# Altium PCB omnibotdebug.PcbDoc
Units mil, origin at the board's own origin, x right, y up, seen from the top; angles counter-clockwise.
Board outline 640 x 455 mil, 2 copper layers (Top Layer, Bottom Layer); 5 components, 6 nets, 34 pads, 8 vias.
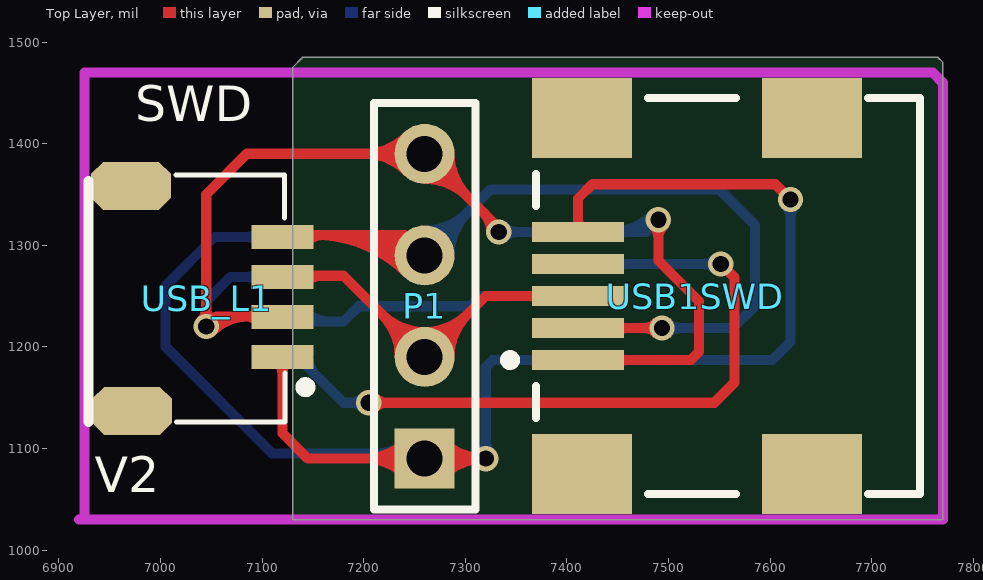
[diagram p0: Top Layer view]
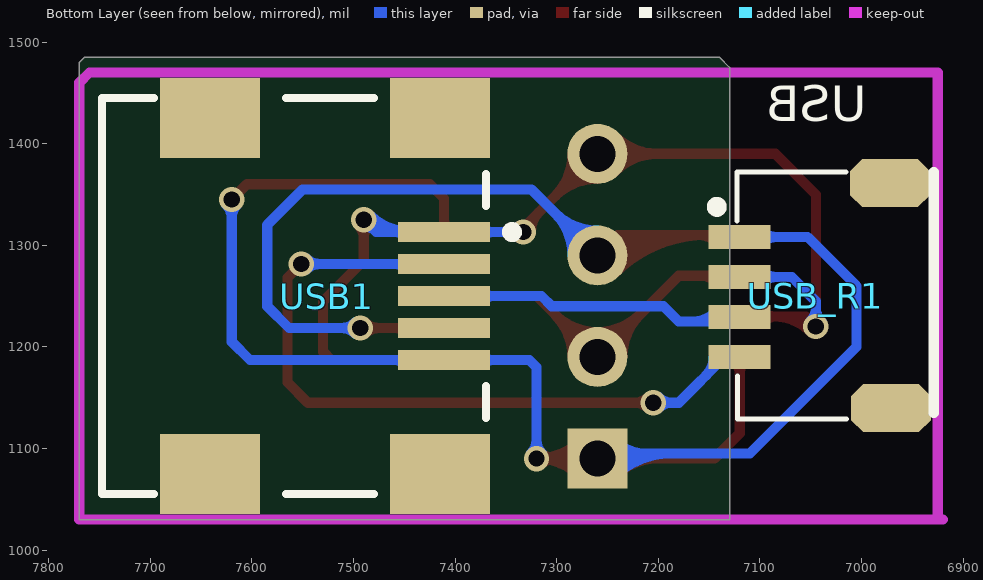
[diagram p1: Bottom Layer view, seen from below]

## Layer stack, top to bottom
Top Layer: signal copper 1.4
Dielectric: dielectric 12.6, FR-4, Dk 4.8
Bottom Layer: signal copper 1.4

## Board outline
7130,1030 7770,1030 7770,1480 7765,1485 7140,1485 7130,1475

## Design rules (kind name [scope] priority, off if disabled: settings)
Clearance [All] p1: gap=10
PolygonConnect [All] p1: connectstyle=Relief reliefconductorwidth=10 reliefentries=4 polygonreliefangle="90 Angle"
RoutingVias [All] p1: holewidth=28 width=50 viastyle="Through Hole" minholewidth=16 minwidth=25 maxholewidth=28 maxwidth=50
SilkscreenOverComponentPads [All] p1: minsilkscreentomaskgap=10
SolderMaskExpansion [All] p1: expansion=4
Width [All] p1: maxlimit=10 minlimit=10 preferedwidth=10
27 further rules are at their usual default settings.

## Components (designator, comment, footprint, x,y, rotation, side; value= is the part's Value field where it differs from the comment)
P1 "Header 4" HDR1X4 7260,1090 r90 top
USB1 "USB-B(Mini)" USB/SM0.8-6H5_M 7720,1250 r0 bottom
USB1SWD "USB-B(Mini)" USB/SM0.8-6H5_M 7720,1250 r0 top
USB_L1 "Header 4" SH1.0-4P 7120,1190 r90 top
USB_R1 "Header 4" SH1.0-4P 7120,1308.11 r270 bottom

## Footprints (in the part's own frame and the unit in brackets; to place one, negate y for a bottom-side part, rotate by r counter-clockwise, add the part's x,y. Pads: shape width x height; smd on the part's side, far side on the other; paste and mask are expansions set on the pad)
HDR1X4 [mm] "Connector; Header; 4 Position"
  rect 1.5x1.5 hole 0.9: 1(0,0)
  round 1.5 hole 0.9: 2(2.54,0) 3(5.08,0) 4(7.62,0)
  silkscreen extent -1.27,-1.27 8.89,1.27
SH1.0-4P [mm]
  rect 0.6x1.55 smd: 1(0,0) 2(1,0) 3(2,0) 4(3,0)
  oct 1.2x2 smd: A(-1.346,3.759) B(4.279,3.785)
  silkscreen extent -1.63,-0.7 4.55,4.85
USB/SM0.8-6H5_M [mm]
  rect 2.3x0.5 smd: 1(-7.85,-1.6) 2(-7.85,-0.8) 3(-7.85,0) 4(-7.85,0.8) 5(-7.85,1.6)
  rect 2.5x2 smd: 6(-7.75,4.45) 7(-1.996,4.45) 8(-7.75,-4.45) 9(-1.996,-4.45)
  silkscreen extent -9.67,-4.95 0.7,4.95

## Part data
P1 USB_L1 USB_R1: "Header, 4-Pin"
USB1 USB1SWD: library part USB5

## Via types
v1: diameter 25, hole 16, Top Layer to Bottom Layer, 8 vias

## Nets (pads, with @x,y where several pads share a name; then routed paths per layer and width w, separated by ;. In a path a pad name is that pad's centre, name@x,y a point inside that pad or via, vN(x,y) a via of type N, cw(c..) or ccw(c..) an arc to the next point about the centre after c; other vN are vias at no path point)
5V: P1.4 USB1.1 USB1SWD.1 USB_L1.2 USB_R1.2 | length 1774.3
  Top Layer w10: v1@7039.7,1225.3 ccw(c7026.89,1238.11) 7045,1238.11 ccw(c7063.11,1238.11) v1@7050.3,1225.3 ; v1@7043.23,1221.77 cw(c7063.11,1201.89) 7063.11,1230 ; v1@7050.3,1214.7 cw(c7087.25,1177.75) 7087.25,1230 ; 7083.34,1230 cw(c7083.34,1211.41) USB_L1.2@7096.48,1224.55 ; 7086.38,1230 ccw(c7086.38,1244.29) USB_L1.2@7096.48,1234.19 ; USB_L1.2@7130,1230 7055,1230 v1(7045,1220) 7045,1350 7085,1390 P1.4 7332.99,1317.01 v1(7332.99,1312.99) ; P1.4@7242.66,1372.66 ccw(c7200.79,1330.79) 7200.79,1390 ccw(c7200.79,1449.21) P1.4@7242.66,1407.34 ; P1.4@7249.73,1379.73 ccw(c7224.93,1354.93) 7224.93,1390 ccw(c7224.93,1425.07) P1.4@7249.73,1400.27 ; P1.4@7260,1365.47 cw(c7260,1306.26) 7301.87,1348.13 cw(c7343.74,1390) P1.4@7284.53,1390 ; P1.4@7260,1375.47 cw(c7260,1340.4) 7284.8,1365.2 cw(c7309.6,1390) P1.4@7274.53,1390 ; 7317.35,1332.65 cw(c7297.69,1312.99) v1@7325.49,1312.99 ; USB1SWD.1 7522.01,1187.01 7530,1195 7530,1245 7490,1285 v1(7490,1325) ; USB1SWD.1@7449.8,1183.58 cw(c7458.07,1175.32) 7458.07,1187.01 cw(c7458.07,1198.7) USB1SWD.1@7449.8,1190.43 ; v1@7484.7,1319.7 cw(c7471.89,1306.89) 7490,1306.89 cw(c7508.11,1306.89) v1@7495.3,1319.7
  Bottom Layer w10: v1@7039.7,1225.3 ccw(c7026.89,1238.11) 7045,1238.11 ccw(c7063.11,1238.11) v1@7050.3,1225.3 ; v1(7045,1220) 7045,1245 7068.74,1268.74 USB_R1.2 ; USB_R1.2@7096.48,1263.92 ccw(c7084.86,1252.3) 7084.86,1268.74 ccw(c7084.86,1285.18) USB_R1.2@7096.48,1273.56 ; v1(7332.99,1312.99) USB1.1 7477.99,1312.99 v1(7490,1325) ; v1@7338.3,1307.69 cw(c7351.1,1294.89) 7351.1,1312.99 cw(c7351.1,1331.1) v1@7338.3,1318.3 ; USB1.1@7372.09,1309.57 ccw(c7363.82,1301.3) 7363.82,1312.99 ccw(c7363.82,1324.68) USB1.1@7372.09,1316.42 ; USB1.1@7442.9,1312.99 ccw(c7442.9,1372.1) v1@7484.7,1330.3 ; USB1.1@7449.8,1309.57 cw(c7458.07,1301.3) 7458.07,1312.99 cw(c7458.07,1324.68) USB1.1@7449.8,1316.42 ; 7467.05,1312.99 ccw(c7467.05,1347.95) v1@7491.77,1323.23
DM: USB1.2 USB_R1.4 | length 843.2
  Top Layer w10: v1(7205,1145) 7545,1145 7565,1165 7565,1268 v1(7551.5,1281.5) ; v1@7210.3,1139.7 cw(c7223.11,1126.89) 7223.11,1145 cw(c7223.11,1163.11) v1@7210.3,1150.3
  Bottom Layer w10: USB_R1.4@7135,1190 7180,1145 v1(7205,1145) ; USB_R1.4@7145.51,1190 ccw(c7170.89,1190) 7152.94,1172.06 ; v1@7199.7,1139.7 ccw(c7186.89,1126.89) 7186.89,1145 ccw(c7186.89,1163.11) v1@7199.7,1150.3 ; USB1.2 v1(7551.5,1281.5) ; USB1.2@7449.8,1278.07 cw(c7458.07,1269.81) 7458.07,1281.5 cw(c7458.07,1293.19) USB1.2@7449.8,1284.92 ; v1@7546.19,1276.19 ccw(c7533.39,1263.39) 7533.39,1281.5 ccw(c7533.39,1299.6) v1@7546.19,1286.8
DP: USB1.3 USB_R1.3 | length 414.3
  Bottom Layer w10: USB_R1.3@7125,1225 7180,1225 7195,1240 7295,1240 ; USB_R1.3@7143.52,1234.19 ccw(c7165.69,1256.36) 7165.69,1225 ; 7220,1240 7295,1240 ; USB1.3@7372.09,1246.58 ccw(c7363.82,1238.31) 7363.82,1250 ccw(c7363.82,1261.69) USB1.3@7372.09,1253.43 ; USB1.3 7315,1250 7305,1240 7295,1240
GND: P1.1 USB1.5 USB1SWD.5 USB_L1.1 USB_R1.1 | length 2200.4
  Top Layer w10: USB_L1.1@7115.18,1185.18 cw(c7103.56,1173.56) 7120,1173.56 cw(c7136.44,1173.56) USB_L1.1@7124.82,1185.18 ; USB_L1.1@7120,1195 USB_L1.1 7120,1115 7145,1090 P1.1 v1(7320,1090) ; P1.1@7242.66,1072.66 ccw(c7200.79,1030.79) 7200.79,1090 ccw(c7200.79,1149.21) P1.1@7242.66,1107.34 ; P1.1@7249.73,1079.73 ccw(c7224.93,1054.93) 7224.93,1090 ccw(c7224.93,1125.07) P1.1@7249.73,1100.27 ; P1.1@7270.27,1079.73 cw(c7295.07,1054.93) 7295.07,1090 cw(c7295.07,1125.07) P1.1@7270.27,1100.27 ; P1.1@7277.34,1072.66 cw(c7319.21,1030.79) 7319.21,1090 cw(c7319.21,1149.21) P1.1@7277.34,1107.34 ; v1@7314.7,1084.7 ccw(c7301.89,1071.89) 7301.89,1090 ccw(c7301.89,1108.11) v1@7314.7,1095.3 ; USB1SWD.5@7407.52,1316.41 ccw(c7399.25,1324.68) 7410.94,1324.68 ccw(c7422.63,1324.68) USB1SWD.5@7414.37,1316.41 ; USB1SWD.5 7410.94,1345.94 7425,1360 7605,1360 v1(7620,1345)
  Bottom Layer w10: USB_R1.1@7096.48,1303.29 ccw(c7084.86,1291.67) 7084.86,1308.11 ccw(c7084.86,1324.55) USB_R1.1@7096.48,1312.93 ; USB_R1.1 7053.11,1308.11 7005,1260 7005,1200 7110,1095 P1.1@7260,1095 ; 7188.71,1095 cw(c7188.71,1018.71) P1.1@7242.66,1072.66 ; P1.1@7242.66,1107.34 cw(c7212.86,1137.14) 7212.86,1095 cw(c7212.86,1042.86) P1.1@7249.73,1079.73 ; v1@7314.7,1095.3 ccw(c7301.89,1108.11) 7320,1108.11 ccw(c7338.11,1108.11) v1@7325.3,1095.3 ; v1(7320,1090) 7320,1180 7327.01,1187.01 USB1.5 7602.01,1187.01 7620,1205 v1(7620,1345) ; USB1.5@7372.09,1183.59 ccw(c7363.82,1175.32) 7363.82,1187.01 ccw(c7363.82,1198.7) USB1.5@7372.09,1190.43 ; USB1.5@7449.8,1183.59 cw(c7458.07,1175.32) 7458.07,1187.01 cw(c7458.07,1198.7) USB1.5@7449.8,1190.43 ; v1@7614.7,1339.7 cw(c7601.89,1326.89) 7620,1326.89 cw(c7638.11,1326.89) v1@7625.3,1339.7
SCK: P1.2 USB1SWD.3 USB_L1.3 | length 699.3
  Top Layer w10: USB_L1.3@7110,1270 7180,1270 P1.2 7320,1250 USB1SWD.3 ; USB_L1.3@7143.52,1263.92 cw(c7158.19,1249.26) 7158.19,1270 ; USB_L1.3@7143.52,1273.56 ccw(c7152.1,1282.14) 7152.1,1270 ; P1.2@7235.47,1190 ccw(c7176.26,1190) 7218.13,1231.87 ccw(c7260,1273.74) 7260,1214.53 ccw(c7260,1273.74) 7301.87,1231.87 ccw(c7343.74,1190) P1.2@7284.53,1190 ; P1.2@7245.47,1190 ccw(c7210.4,1190) 7235.2,1214.8 ccw(c7260,1239.6) 7260,1204.53 ccw(c7260,1239.6) 7284.8,1214.8 ccw(c7309.6,1190) P1.2@7274.53,1190 ; USB1SWD.3@7372.09,1246.57 ccw(c7363.82,1238.31) 7363.82,1250 ccw(c7363.82,1261.69) USB1SWD.3@7372.09,1253.42
SWD: P1.3 USB1SWD.2 USB_L1.4 | length 1313.6
  Top Layer w10: USB_L1.4@7120,1310 7240,1310 P1.3 ; USB_L1.4@7143.52,1303.29 cw(c7159.71,1287.1) 7159.71,1310 ; USB_L1.4@7143.52,1312.93 ccw(c7150.58,1319.99) 7150.58,1310 ; 7152.5,1310 cw(c7152.5,1182.5) P1.3@7242.66,1272.66 ; 7176.64,1310 cw(c7176.64,1206.64) P1.3@7249.73,1279.73 ; 7200.79,1310 cw(c7200.79,1230.79) P1.3@7256.8,1286.8 ; 7224.93,1310 cw(c7224.93,1254.93) P1.3@7263.87,1293.87 ; USB1SWD.2 v1(7493.5,1218.5) ; USB1SWD.2@7449.8,1215.08 cw(c7458.07,1206.81) 7458.07,1218.5 cw(c7458.07,1230.19) USB1SWD.2@7449.8,1221.93 ; v1@7488.2,1213.2 ccw(c7475.4,1200.4) 7475.4,1218.5 ccw(c7475.4,1236.61) v1@7488.2,1223.81
  Bottom Layer w10: P1.3 7325,1355 7550,1355 7585,1320 7585,1240 7563.5,1218.5 v1(7493.5,1218.5) ; P1.3@7260,1304.53 ccw(c7260,1339.6) 7284.8,1314.8 ccw(c7309.6,1290) P1.3@7274.53,1290 ; P1.3@7260,1314.53 ccw(c7260,1373.74) 7301.87,1331.87 ccw(c7343.74,1290) P1.3@7284.53,1290 ; v1@7498.81,1213.2 cw(c7511.61,1200.4) 7511.61,1218.5 cw(c7511.61,1236.61) v1@7498.81,1223.81
pads on no net: USB1.4 USB1.6 USB1.7 USB1.8 USB1.9 USB1SWD.4 USB1SWD.6 USB1SWD.7 USB1SWD.8 USB1SWD.9 USB_L1.A USB_L1.B USB_R1.A USB_R1.B

## Keep-outs
Keep-Out Layer:
  lines w10: 6920,1030 7770,1030 7770,1460 7760,1470 6925,1470 6925,1030

## Silkscreen, mask and mechanical layers (free items; w line width, h text height)
Top Overlay:
  text "SWD" at 6975,1410 h60
  text "V2" at 6935,1045 h60
Bottom Overlay:
  text "USB" at 6995,1410 h60